# Altium PCB sdlogger.PcbDoc
Units mil, origin at the board's own origin, x right, y up, seen from the top; angles counter-clockwise.
Board outline 1259.84 x 1377.95 mil, 2 copper layers (Top Layer, Bottom Layer); 61 components, 47 nets, 243 pads, 91 vias.
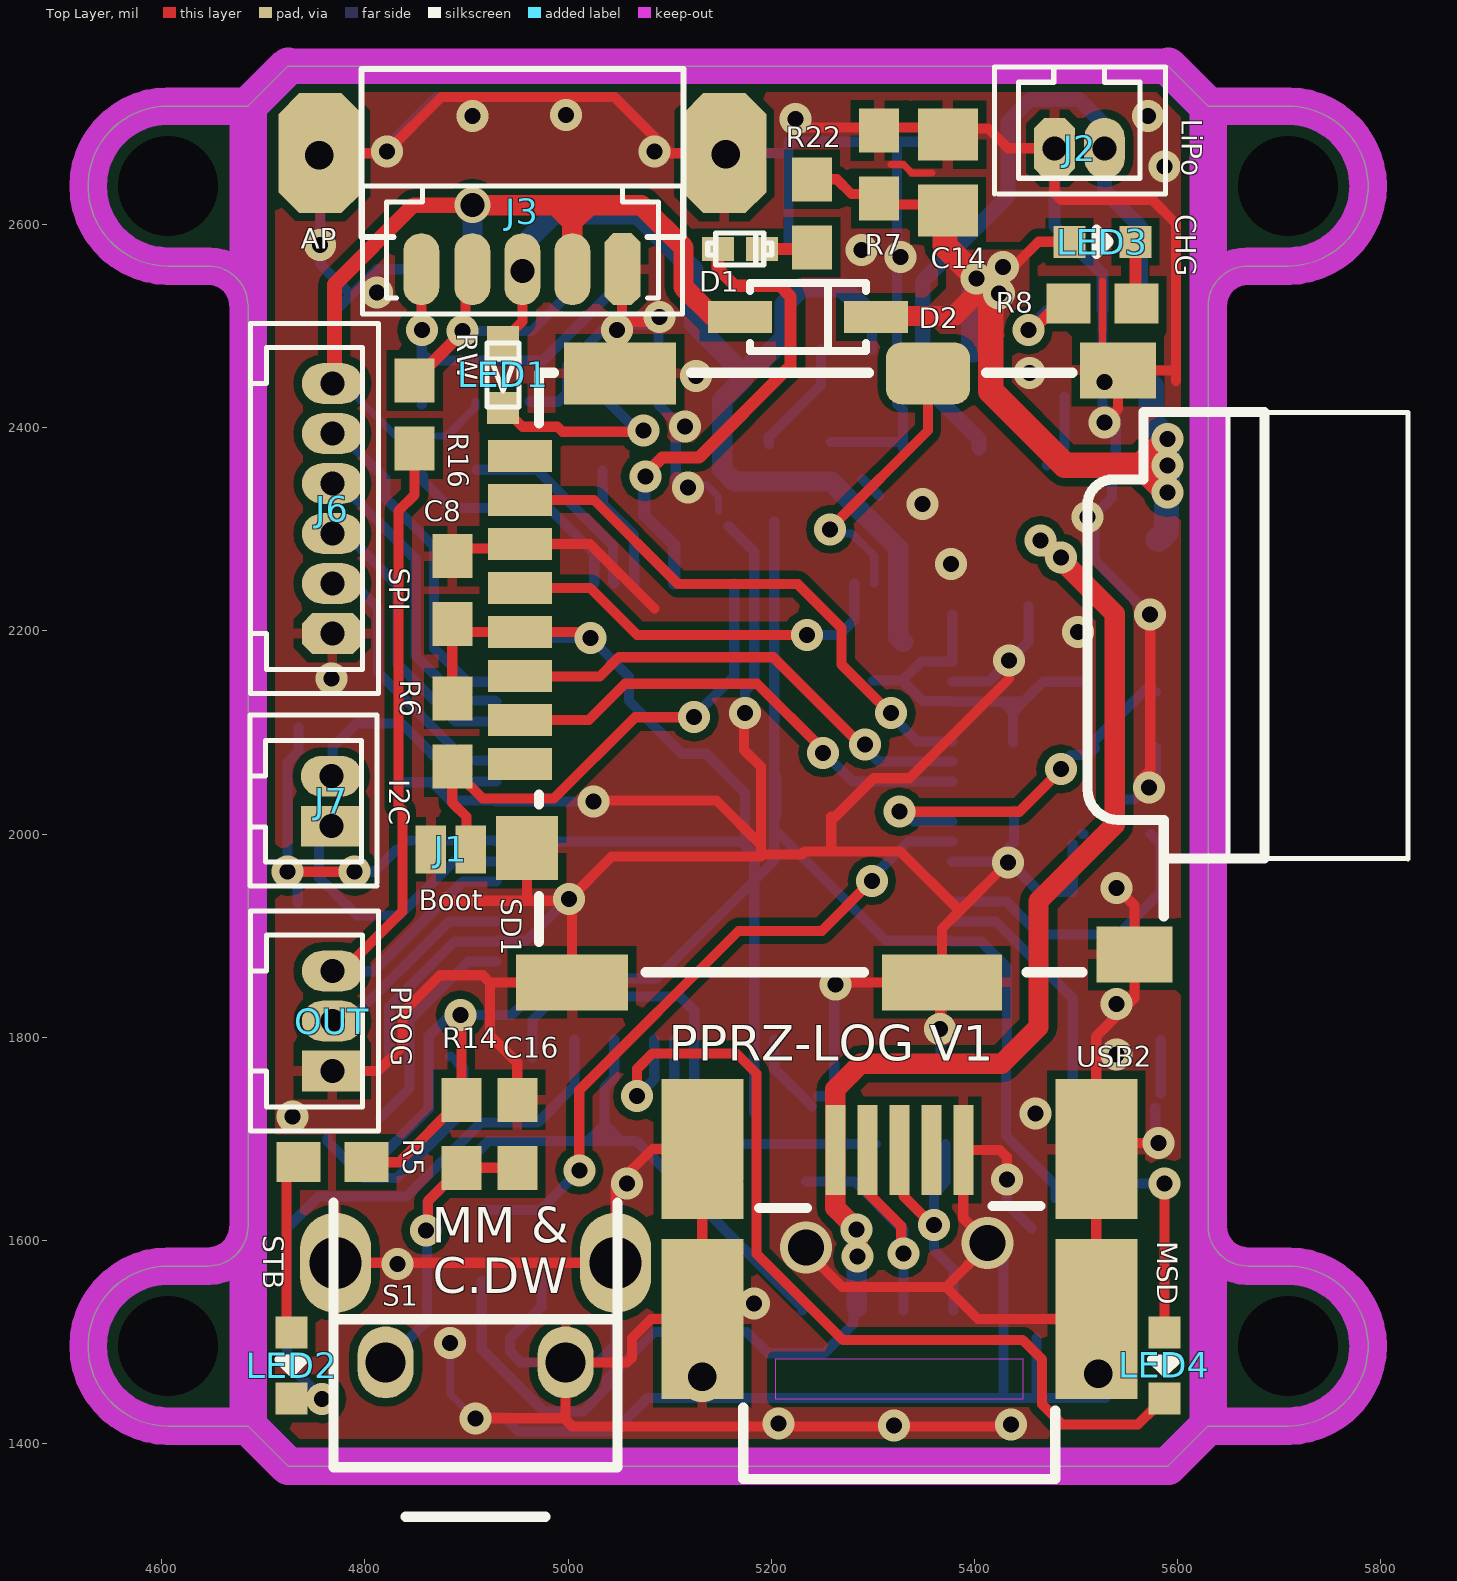
[diagram p0: Top Layer view]
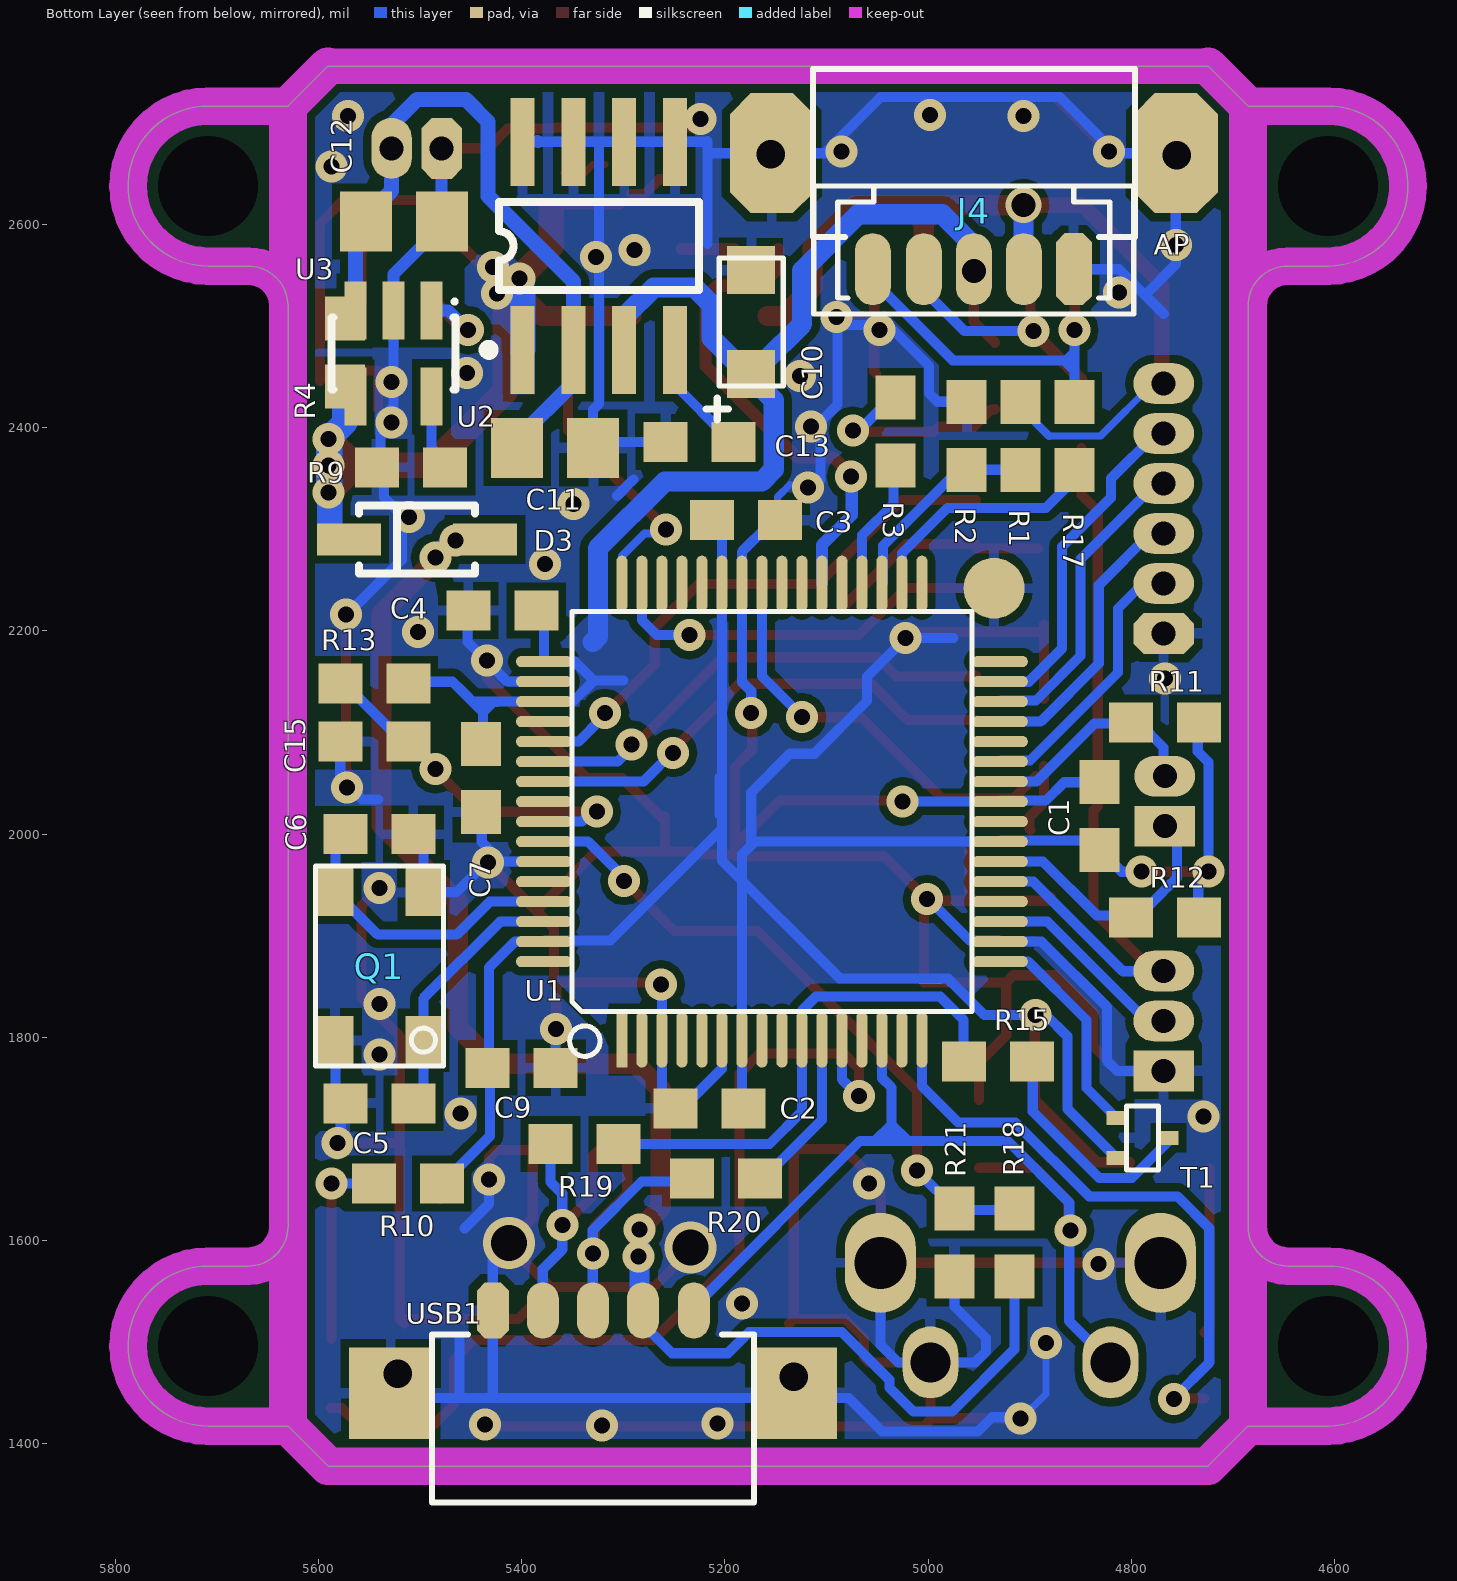
[diagram p1: Bottom Layer view, seen from below]

## Layer stack, top to bottom
Top Layer: signal copper 1.4
Dielectric: dielectric 12.6, FR-4, Dk 4.8
Bottom Layer: signal copper 1.4

## Board outline
4606.3,1417.32 4685.04,1417.32 4724.41,1377.95 5590.55,1377.95 5629.92,1417.32 5708.66,1417.32 ccw(c5708.66,1496.06) 5708.66,1574.8 5669.29,1574.8 cw(c5669.29,1614.17) 5629.92,1614.17 5629.92,2519.69 cw(c5669.29,2519.69) 5669.29,2559.06 5708.66,2559.06 ccw(c5708.66,2637.8) 5708.66,2716.54 5629.92,2716.54 5590.55,2755.91 4724.41,2755.91 4685.04,2716.54 4606.3,2716.54 ccw(c4606.3,2637.8) 4606.3,2559.05 4606.3,2559.06 4645.67,2559.06 cw(c4645.67,2519.68) 4685.04,2519.68 4685.04,1614.17 cw(c4645.67,1614.17) 4645.67,1574.8 4606.3,1574.8 ccw(c4606.3,1496.06)

## Design rules (kind name [scope] priority, off if disabled: settings)
Clearance [All] p1: gap=8
ComponentClearance [All] p1 off: gap=0 collisioncheckmode=3 verticalgap=0 showdistances=FALSE
HoleSize [All] p1: absolutevalues=TRUE maxlimit=196.85 minlimit=1 maxpercent=80.000 minpercent=20.000
MinimumSolderMaskSliver [All] p1: minsoldermaskwidth=0
PlaneConnect PlaneConnectVia [IsVia] p1: planeconnectstyle=Direct reliefexpansion=20 reliefentries=4 reliefconductorwidth=10 reliefairgap=10
PlaneConnect [All] p2: planeconnectstyle=Relief reliefexpansion=20 reliefentries=4 reliefconductorwidth=10 reliefairgap=10
PolygonConnect PolygonConnect_Via [IsVia or InNet('EN/CHG')] p1: connectstyle=Direct reliefconductorwidth=10 reliefentries=4 polygonreliefangle="90 Angle"
PolygonConnect [All] p2: connectstyle=Relief reliefconductorwidth=10 reliefentries=4 polygonreliefangle="90 Angle"
RoutingVias [All] p1: holewidth=28 width=50 viastyle="Through Hole" minholewidth=11.81 minwidth=27.56 maxholewidth=118.11 maxwidth=196.85
SilkToSilkClearance [All] p1: silktosilkclearance=1
SilkscreenOverComponentPads [All] p1 off: minsilkscreentomaskgap=1
SolderMaskExpansion SolderMaskExpansion_Via [IsVia] p1: expansion=-100
SolderMaskExpansion [All] p2: expansion=4
TestPointUsage [All] p1: valid=0 allowmultiple=FALSE
Testpoint [All] p1: side=15 testpointundercomponent=TRUE minsize=40 maxsize=100 preferedsize=60 minholesize=0 maxholesize=40 preferedholesize=32 testpointgrid=1 style=1023 order=0123456789
Width [All] p1: maxlimit=50 minlimit=6 preferedwidth=10 toplayer_minwidth=7 bottomlayer_minwidth=7 minimp=50.000000 maximp=50.000000 favimp=50.000000
18 further rules are at their usual default settings.

## Components (designator, comment, footprint, x,y, rotation, side; value= is the part's Value field where it differs from the comment)
C1 "100nF" 0603 4831,2018 r90 bottom
C2 "100nF" 0603 5215,1730 r180 bottom
C3 "100nF" 0603 5179,2309 r0 bottom
C4 "100nF" 0603 5419,2220 r0 bottom
C5 "18pF" 0603 5540,1735 r180 bottom
C6 "18pF" 0603 5540,2000 r0 bottom
C7 "100nF" 0603 5440,2055 r90 bottom
C8 "0603" 0603 4886,2240 r90 top
C9 "100nF" 0603 5400,1770 r0 bottom
C10 "33uF/6V" T491A 5174,2504 r270 bottom
C11 "470nF" 0805 5367,2380 r180 bottom
C12 "4.7uF" 0805 5516,2603 r180 bottom
C13 "470pF" 0603 5225,2386 r0 bottom
C14 "4.7uF" 0805 5374,2651 r90 top
C15 "100nF" 0603 5545,2091 r0 bottom
C16 "0603" 0603 4950,1705 r270 top
D1 "Schottky 1PS79SB10" 1PS79SB10 5169,2576 r180 top
D2 "Schottky 250mA" SOD123 5236,2509 r0 top
D3 "Schottky 250mA" SOD123 5503,2290 r0 bottom
J1 "Boot" 2pin1mmpitch 4865,1985 r0 top
J2 "LiPo" PICOBLADE_53047-0210#1 5478,2675 r270 top
J3 "AP" PICOBLADE_53047-0510_FLAT 4955,2556 r180 top
J4 "AP" PICOBLADE_53047-0510_FLAT 4955,2556 r0 bottom
J6 "SPI" PICOBLADE_53047-0610 4768,2200 r0 top
J7 "I2C" PICOBLADE_53047-0210#2 4767,2007 r0 top
LED1 "RW" KP-1608SURC 4936,2452 r270 top
LED2 "STB" KP-1608SURC 4728,1477 r270 top
LED3 "CHG" KP-1608SURC 5526,2583 r0 top
LED4 "MSD" KP-1608SURC 5587,1477 r270 top
OUT "PROG" PICOBLADE_53047-0310 4768,1766 r0 top (schematic designator J2)
Q1 "CTS405 12MHz" CTS_405 5540,1870 r90 bottom
R1 "1.8k" 0603RES 4909,2392 r90 bottom
R2 "3.3k" 0603RES 4962,2392 r270 bottom
R3 "1K" 0603RES 5032,2396 r90 bottom
R4 "DNP/0R" 0603RES 5574,2474 r90 bottom
R5 "1K" 0603RES 4768,1677 r0 top
R6 "10K" 0603RES 4886,2100 r90 top
R7 "1M" 0603RES 5306,2659 r270 top
R8 "1K" 0603RES 5526,2522 r180 top
R9 "10K" 0603RES 5509,2361 r180 bottom
R10 "1K" 0603RES 5512,1656 r180 bottom
R11 "4.7K" 0603RES 4767,2110 r180 bottom
R12 "4.7K" 0603RES 4767,1918 r180 bottom
R13 "10k" 0603RES 5545,2148 r0 bottom
R14 "10k" 0603RES 4895,1705 r90 top
R15 "1.5K" 0603RES 4931,1776 r180 bottom
R16 "1k" 0603RES 4849,2413 r90 top
R17 "1k" 0603RES 4856,2392 r90 bottom
R18 "1.8k" 0603RES 4915,1598 r270 bottom
R19 "33" 0603RES 5338,1695 r180 bottom
R20 "33" 0603RES 5199,1661 r180 bottom
R21 "3.3k" 0603RES 4974,1598 r90 bottom
R22 "1k" 0603RES 5240,2611 r90 top
S1 "SW-PB" FSMRA2JH 4909,1480 r0 top locked
SD1 "MICROSD-CARD" MICROSD-CARD 5595,2195 r90 top locked
T1 "DTA143ZE" DTA143ZE 4789,1701 r270 bottom
U1 "LPC2148FBD64" LPC2148FBD64 5153.71,2022.12 r90 bottom
U2 "MIC5209-3.3YM" SO8 5324,2579 r180 bottom
U3 "MCP73831-2 AC or AD" SOT23-5 5526,2473 r0 bottom
USB1 "Remote USB Header" PICOBLADE_53047-0510_FLAT_ONLY 5330,1539 r180 bottom
USB2 "Mini-Usb Connector" MINIUSB 5326,1444 r90 top

## Footprints (in the part's own frame and the unit in brackets; to place one, negate y for a bottom-side part, rotate by r counter-clockwise, add the part's x,y. Pads: shape width x height; smd on the part's side, far side on the other; paste and mask are expansions set on the pad)
1PS79SB10 [mm]
  rect 0.8x0.6 smd: 1(-0.55,0) 2(0.55,0)
  silkscreen extent -0.8,-0.4 0.8,0.4, body extent -0.4,-0.4 0.6,0.4, height 1.5
2pin1mmpitch [mm]
  rect 0.762x1.2 smd: 1(0,0) 2(1,0)
0603 [mm] "Chip Capacitor; Body 1.6 x 0.8 mm (LxW typ)"
  rect 1.1x1 smd: 1(-0.85,0) 2(0.85,0)
  body extent -1.12,-0.46 1.02,0.46, height 0.6
0603RES [mm] "Chip Capacitor; Body 1.6 x 0.8 mm (LxW typ)"
  rect 1.1x1 smd: 1(-0.85,0) 2(0.85,0)
  body extent -1.12,-0.46 1.02,0.46, height 0.4
0805 [mm] "Chip Capacitor; Body 2.0 x 1.2 mm (LxW typ)"
  rect 1.3x1.5 smd: 1(-0.95,0) 2(0.95,0)
  body extent -1.3,-0.66 1.32,0.66, height 0.8
CTS_405 [mm]
  rect 1.2x0.9 smd: 1(-1.85,-1.1) 2(1.85,-1.1) 3(1.85,1.1) 4(-1.85,1.1)
  silkscreen extent -2.5,-1.6 2.5,1.6, body extent -2.5,-1.6 2.5,1.6, height 1.1
DTA143ZE [mm]
  rect 0.35x0.5 smd: 1(-0.5,-0.65) 2(0.5,-0.65) 3(0,0.65)
  silkscreen extent -0.8,-0.4 0.8,0.4, body extent -0.86,-0.46 0.86,0.46, height 0.7
FSMRA2JH [mm] "PushButton Tyco FSMRA2JH 1555987"
  oval 1.397x1.8 hole 1: 1(-2.25,0) 2(2.25,0)
  oval 1.778x2.5 hole 1.3: 2(-3.5,2.49) 2(3.5,2.49)
  silkscreen extent -3.55,-3.86 3.55,4, body extent -3.56,-3.84 3.56,4.01, height 7.01
KP-1608SURC [mm]
  rect 0.8x0.8 smd: 1(-0.825,0) 2(0.825,0)
  silkscreen extent -0.8,-0.4 0.8,0.4, body extent -0.86,-0.46 0.86,0.46, height 0.6
LPC2148FBD64 [mm]
  rect 1.4x0.28 smd: 1(-5.7,3.75)
  oval 1.4x0.28 smd: 2(-5.7,3.25) 3(-5.7,2.75) 4(-5.7,2.25) 5(-5.7,1.75) 6(-5.7,1.25) 7(-5.7,0.75) 8(-5.7,0.25) 9(-5.7,-0.25) 10(-5.7,-0.75) 11(-5.7,-1.25) 12(-5.7,-1.75) 13(-5.7,-2.25) 14(-5.7,-2.75) 15(-5.7,-3.25) 16(-5.7,-3.75) 33(5.7,-3.75) 34(5.7,-3.25) 35(5.7,-2.75) 36(5.7,-2.25) 37(5.7,-1.75) 38(5.7,-1.25) 39(5.7,-0.75) 40(5.7,-0.25) 41(5.7,0.25) 42(5.7,0.75) 43(5.7,1.25) 44(5.7,1.75) 45(5.7,2.25) 46(5.7,2.75) 47(5.7,3.25) 48(5.7,3.75)
  oval 0.28x1.4 smd: 17(-3.75,-5.7) 18(-3.25,-5.7) 19(-2.75,-5.7) 20(-2.25,-5.7) 21(-1.75,-5.7) 22(-1.25,-5.7) 23(-0.75,-5.7) 24(-0.25,-5.7) 25(0.25,-5.7) 26(0.75,-5.7) 27(1.25,-5.7) 28(1.75,-5.7) 29(2.25,-5.7) 30(2.75,-5.7) 31(3.25,-5.7) 32(3.75,-5.7) 49(3.75,5.7) 50(3.25,5.7) 51(2.75,5.7) 52(2.25,5.7) 53(1.75,5.7) 54(1.25,5.7) 55(0.75,5.7) 56(0.25,5.7) 57(-0.25,5.7) 58(-0.75,5.7) 59(-1.25,5.7) 60(-1.75,5.7) 61(-2.25,5.7) 62(-2.75,5.7) 63(-3.25,5.7) 64(-3.75,5.7)
  silkscreen extent -6.12,-5 5,5.06, body extent -5.06,-5.06 5.06,5.06, height 1.3
MICROSD-CARD [mm]
  rrect50% 1.55x2.1 smd: CD(6.566,6.114)
  rect 0.8x1.6 smd: CLK(1.201,16.314) CMD(-0.999,16.314) DAT0(3.401,16.314) DAT1(4.501,16.314) DAT2(-3.199,16.314) DAT3(-2.099,16.314) GND(2.301,16.314) VDD(0.101,16.314)
  rect 1.4x2.8 smd: GND(-8.659,15.014)
  rect 1.4x3 smd: GND(-8.659,5.764)
  rect 1.4x1.9 smd: GND(-7.959,0.95) GND(6.641,1.364)
  rect 1.6x1.55 smd: GND(-5.299,16.139)
  rect 1.55x2.8 smd: GND(6.566,13.814)
  silkscreen extent -8.41,-5.89 6.58,15.84, body extent -8.41,-2.29 6.58,15.84, height 1.95
MINIUSB [mm]
  rect 2.25x0.5 smd: D+(6.225,0) D-(6.225,0.8) Gnd(6.225,-1.6) ID(6.225,-0.8) VBus(6.225,1.6)
  rect 4x2.05 smd: GND(2,4.925) GND(2,-4.925)
  rect 3.5x2.05 smd: GND(6.25,-4.925) GND(6.25,4.925)
  Top Layer keep-out region: 0.001,-3.098 0.991,-3.098 0.991,3.102 0.001,3.102
  silkscreen extent -2,-3.9 4.83,3.9, body extent -1.81,-4.95 7.19,4.95, height 4.6
PICOBLADE_53047-0210#1 [mil]
  oct 60x40 hole 23.62: 1(0,0.79)
  oval 60x40 hole 23.62: 2(0,50)
  silkscreen extent -80,-58 45,110, body extent -80,-60 45,110, height 118
PICOBLADE_53047-0210#2 [mil]
  rect 60x40 hole 23.62: 1(0,0.79)
  oval 60x40 hole 23.62: 2(0,50)
  silkscreen extent -80,-58 45,110, body extent -80,-60 45,110, height 118
PICOBLADE_53047-0310 [mil]
  rect 60x40 hole 23.62: 1(0,0.79)
  oval 60x40 hole 23.62: 2(0,50) 3(0,99.21)
  silkscreen extent -81,-58 45,158, body extent -81,-59 45,158, height 118
PICOBLADE_53047-0510_FLAT [mm]
  oct 2.1x3 smd: 1(-5.05,-2.9) 1(5.05,-2.9)
  oct 0.9x1.8 smd: 1(-2.5,0)
  oval 0.9x1.8 smd: 2(-1.25,0) 3(0,0) 4(1.25,0) 5(2.525,0)
  silkscreen extent -4.03,-5 4.03,1.12, body extent -4.03,-5 4.03,0.18, height 3.4
PICOBLADE_53047-0510_FLAT_ONLY [mm]
  rect 2.1x2.286 smd: 1(-5.05,-2.265) 1(5.05,-2.265)
  oct 0.8x1.4 smd: 1(-2.5,-0.2)
  oval 0.8x1.4 smd: 2(-1.25,-0.2) 3(0,-0.2) 4(1.25,-0.2) 5(2.525,-0.2)
  silkscreen extent -4.03,-5 4.03,-0.8, body extent -4.03,-5 4.03,0.18, height 3.4
PICOBLADE_53047-0610 [mil]
  oct 60x40 hole 23.62: 1(0,-2.64)
  oval 60x40 hole 23.62: 2(0,46.57) 3(0,95.79) 4(0,145) 5(0,194.21) 6(0,243.43)
  silkscreen extent -81,-62 45,302, body extent -82,-62 45,302, height 118
SO8 [mm] "Small Outline; 8 Leads; Body Width 3.9 mm; Pitch 1.27 mm"
  rect 0.6x2.2 smd: 1(-1.905,-2.6) 2(-0.635,-2.6) 3(0.635,-2.6) 4(1.905,-2.6) 5(1.905,2.6) 6(0.635,2.6) 7(-0.635,2.6) 8(-1.905,2.6)
  silkscreen extent -2.88,-2.72 2.5,1.1, body extent -2.5,-1.1 2.5,1.1, height 1.75
SOD123 [mm] "SOD-123; 2 Leads; Body 2.7 x 1.6 mm, (LxW)"
  rect 1.6x0.8 smd: 1(-1.7,0) 2(1.7,0)
  silkscreen extent -1.45,-0.85 1.45,0.85, body extent -1.55,-0.95 1.55,0.95, height 1.35
SOT23-5 [mm] "SOT-23/SC-74A; 5 Leads; Body 3 x 3 mm, inc. leads (LxW max)"
  rect 0.55x1.45 smd: 1(-0.95,-1.075) 2(0,-1.075) 3(0.95,-1.075) 4(0.95,1.075) 5(-0.95,1.075)
  silkscreen extent -1.57,-1.35 1.55,0.9, body extent -1.65,-1.4 1.65,1, height 1.45
T491A [mm]
  rect 1.2x1.2 smd: 1(1.3,0) 2(-1.3,0)
  silkscreen extent -1.6,-1.12 2.45,0.8, body extent -1.66,-0.86 1.66,0.86, height 1.8

## Part data
C1 C2 C3 C4 C5 C6 C7 C9 C11 C12 C13 C14 C15: library part CAP
C8 C16: library part Cap, "Capacitor"
C10: library part ELECTRO1
D1: library part 1PS79SB10, "Diode Schottky 0.2A/30v (GRZ 09/2007)"
D2 D3: library part "D Schottky", "Schottky Diode"
J1 J2 J7: library part "Header 2", "Header, 2-Pin"
J3 J4 USB1: library part "Header 5", "Header, 5-Pin"
J6: library part "Header 6", "Header, 6-Pin"
LED1: library part KP-1608SURC, "Led vert 0603"
LED2: library part KP-1608SURC_1, "Led jaune 0603"
LED3 LED4: library part KP-1608SURC, "Led rouge 0603 (GRZ 10/2007)"
OUT: library part "Header 3", "Header, 3-Pin"
Q1: library part CRYSTAL_CTS_405, "Crystal 12 Mhz SMD (DMT 06/2007)"
R1 R2 R3 R4 R5 R6 R7 R8 R9 R10 R11 R12 R13 R14 R15 R16 R17 R18 R19 R20 R21 R22: library part RES1
S1: "Switch"
T1: "PNP PRE-BIASED SMALL SIGNAL SURFACE MOUNT TRANSISTOR (GRZ 09/2009)"
U1: "Single-chip ARM7 32-bit microcontroller (GRZ 04/2007)"
U2: "Micropower 100 mA Ultra Low-Dropout Regulator in SOT-23 and micro SMD Packages"
U3: library part MCP73831-2Ax, "Lithium Battery Charger max 500mA: 7.5% I/Ireg stop, 10% Iprecon ..."
USB2: library part USB_Host, "Mini USB Connector"

## Free pads (board coordinates)
  round 0 hole 98.43: 0(4606.3,1496.06) 0(4606.3,2637.8) 0(5708.66,1496.06) 0(5708.66,2637.8)
  round 60 smd far side: 0(4935,2242)

## Via types
v1: diameter 31.5, hole 15.75, Top Layer to Bottom Layer, 83 vias
v2: diameter 50, hole 28, Top Layer to Bottom Layer, 4 vias
v3: diameter 51.18, hole 35.43, Top Layer to Bottom Layer, tented both sides, 2 vias
v4: diameter 35.43, hole 23.62, Top Layer to Bottom Layer, 2 vias

## Nets (pads, with @x,y where several pads share a name; then routed paths per layer and width w, separated by ;. In a path a pad name is that pad's centre, name@x,y a point inside that pad or via, vN(x,y) a via of type N, cw(c..) or ccw(c..) an arc to the next point about the centre after c; other vN are vias at no path point)
+3.3V: C1.1 C2.2 C3.2 C4.1 C7.2 C8.1 C9.2 C10.1 J3.3 J4.3 LED1.1 pad.0@4935,2242 R5.2 R6.2 R10.2 R11.2 R12.2 R13.1 R14.2 SD1.VDD T1.2 U1.7 U1.23 U1.43 U1.49 U1.51 U1.63 U2.3 | length 4537.7
  Top Layer w10: v1(4724,1963) v1(4790,1963) ; R5.2 4833.54,1677 R14.2 v1@4895,1822 ; R6.2@4886,2132.93 C8.1@4886,2206 ; C8.1@4892.57,2198.96 SD1.VDD v1@5021.04,2198.96 ; LED1.1@4934,2483.48 4955,2504.48 J3.3
  Bottom Layer w10: v1@4724,1958 4734,1948 R12.2@4734,1932 ; v1@4724,1964 4724,2070.67 4734.54,2081.2 R11.2@4734.54,2105 ; v1(4790,1963) 4809.46,1963 C1.1 ; T1.2 4862.88,1729.61 4862.88,1801.07 4883.81,1822 4944.54,1822 4980.54,1858 5087,1858 5202.92,1973.92 U1.43 C3.2@5202.92,2307.61 ; C1.1@4842.76,1993.76 4928.12,1993.76 U1.23 5170.41,1992.59 5183.24,1979.76 U1.7 C2.2@5183.24,1725.32 ; 4975,2193 v1(5022,2193) 5060,2155 5060,2131 5112,2079 5136,2079 5174,2041 5174,1989 ; 5202.92,2019 5202.92,2005.08 5312.66,1895.34 5376.95,1895.34 U1.63 5406.66,1894.17 5432,1868.83 5432,1771.46 5431,1770.46 5431,1703 5480,1654 R10.2@5480,1641.54 ; 5205,2019 5205,2056 ; U2.3 U2.3@5299,2509 ; 5300,2151 5328.96,2151 ; C4.1@5378.12,2216 U1.49 5347.72,2169.76 5333.98,2156.02 5328.96,2151 ; 5430,2128 5446,2128 ; C7.2@5438,2090 5438,2120 ; 5448.39,2130.39 5417,2130.39 ; R13.1@5509.54,2150 5468,2150 5458,2140 5446,2128 ; 5328.96,2151 5348.96,2131 5377.51,2131 U1.51 5417,2130.39 ; 5417,2130.39 5427.61,2130.39 5438,2120 ; 5417,2130.39 5446,2128 ; 5438,2120 5446,2128
  Bottom Layer w20: J4.3@4956,2580 4986,2610 5068.64,2610 5124,2554.64 5124,2502 C10.1@5162,2464 ; C10.1@5172,2447 5151.88,2426.88 5151.88,2358.86 5163.74,2347 5259.11,2347 5324.86,2281.26 5324.86,2194.14 5330,2189 ; C10.1@5181.18,2463.18 5188.18,2463.18 5213,2488 5213,2521.21 5229.73,2537.95 5270.06,2537.95 U2.3@5299,2509
  other v1: 4894,1822
  other v4: 4955,2554
+5V: D2.1 J3.2 J4.2 J6.6 R1.2 | length 944.2
  Top Layer w15: J6.6@4770,2444 4770,2541 4848,2619 v4(4906,2619)
  Top Layer w20: v4(4906,2619) 5000,2619 5004.21,2614.79 5004.21,2602 ; 4964,2619 5072,2619 5113.6,2577.4 5113.6,2538.4 5142,2510 D2.1@5158.07,2510 ; 4987.21,2619 5004.21,2602 ; J3.2@5004.21,2578.79 5004.21,2602 ; 5021.21,2619 5004.21,2602
  Bottom Layer w7: J6.6@4778.57,2443.43 4830,2392 4880.84,2392
  Bottom Layer w8: 4880.84,2392 4909,2420.16 R1.2
  Bottom Layer w20: J4.2 4906,2556.21 v4@4906,2620
BOOT: J1.2 R6.1 U1.41 | length 487.5
  Top Layer w10: R6.1@4886,2067.17 4886,2031 4900,2017 4900,2005 J1.2@4899,2004 ; R6.1@4894,2057 4916,2035 4986,2035 5066,2115 v1@5123,2115
  Bottom Layer w10: v1@5124,2116 5163.55,2155.55 U1.41
  other v1: 5124,2115
BUTTON: C16.2 R14.1 S1.1 U1.14 USB1.5 | length 921.4
  Top Layer w10: v1@4865,1611 4862,1614 4862,1638.54 R14.1 C16.2
  Bottom Layer w10: S1.1@4822,1481.58 S1.1 4861,1520.58 4861,1637.19 4921.81,1698 5067,1698 5230.59,1534.41 USB1.5 ; 5020,1698 5036,1714 ; 5036,1698 5036,1714 ; U1.14 5045.44,1760.1 5036,1750.66 5036,1714 ; 5052,1698 5036,1714
  other v1: 4860,1610
BYP: C13.1 U2.4 | length 145.9
  Bottom Layer w10: C13.1@5197.54,2384 5197.54,2390.54 5249,2442 U2.4 U2.4@5249,2444.69
CARD: SD1.CD U1.48 | length 269.4
  Top Layer w10: v1@5262,2295 5262,2305 5354.28,2397.28 SD1.CD
  Bottom Layer w8: v1@5265,2296 5279,2296 5301.35,2273.66 U1.48
  other v1: 5258,2300
CHLED: R8.2 U3.1 | length 92.7
  Top Layer w12: v1@5454,2493 5483,2522 R8.2
  Bottom Layer w12: v1@5454,2497 5472.32,2515.32 U3.1
  other v1: 5453,2496
DETECT: R1.1 R2.2 U1.35 | length 199.5
  Bottom Layer w10: R1.1@4910,2358.54 R2.2@4964,2358.54 ; R2.2@4968,2360 5044.27,2283.73 5044.27,2247.7 U1.35
EN/CHG: C14.1 D2.2 D3.2 LED3.1 R4.1 R7.2 R22.2 U2.1 U3.4 | length 1070.6
  Top Layer w10: R22.2@5244,2644.46 5264.54,2644.46 5279,2630 R7.2@5293,2630 ; R7.2@5303.94,2619.6 C14.1@5369,2619.6 ; v1@5433,2553 5463,2583 LED3.1
  Top Layer w20: D2.2@5291.93,2510 5380,2510 v1@5411,2541
  Top Layer w25: C14.1@5371,2613.6 5371,2579 5416.12,2533.88 5416.12,2435.88 5489,2363 v1@5584,2363 ; 5563,2363 v1(5590,2336) ; 5564,2363 v1(5590,2389)
  Bottom Layer w25: U2.1 5399,2532 v1@5412,2545 ; R4.1 5574,2405 v1(5590,2389) v1@5590,2342 ; D3.2@5581,2290 5589,2298 v1@5589,2384
  other v1: 5590,2363 5424,2532 5402,2547 5428,2558
GND: C1.2 C2.1 C3.1 C4.2 C5.1 C6.1 C7.1 C8.2 C9.1 C10.2 C11.2 C12.2 C13.2 C14.2 C15.2 C16.1 J1.1 J2.1 J3.1 J4.1 J6.1 OUT.1 Q1.2 Q1.4 R2.1 R7.1 R9.1 R21.1 S1.2 SD1.GND U1.3 U1.6 U1.18 U1.25 U1.42 U1.50 U1.59 U2.5 U2.6 U2.7 U2.8 U3.2 USB1.1 USB2.Gnd USB2.GND | length 11389.2
  Top Layer w7: 5318,2659 5329.69,2659 5330.14,2659 5338.45,2650.69 5358,2650.69 ; SD1.GND@5526,2471.73 5526,2544
  Top Layer w10: J3.1@4756.18,2670.17 4820.17,2670.17 4875.41,2725.41 5045.59,2725.41 5100.83,2670.17 J3.1@5153.82,2670.17 ; OUT.1 4812.79,1766.79 4837,1791 4837,1824 4874,1861 4916,1861 4923,1854 ; S1.2@4771.2,1578.03 5046.8,1578.03 5046.8,1653.8 5083.06,1690.06 5132.1,1690.06 USB2.GND@5132.1,1522.74 ; 4879,1935 4879,1938 ; 4879.6,1934.4 4959.6,1934.4 ; C8.2@4892,2281 SD1.GND@4952.6,2281 ; v1(4909,1425) 4994,1425 4997.58,1428.58 S1.2@4997.58,1480 ; C16.1 4950,1775 4923,1802 4923,1854 ; SD1.GND@4952.71,2285.57 5021.43,2285.57 5085,2222 ; SD1.GND@4959.6,1986.36 4959.6,1934.4 ; v1(5001,1936) 5043,1978 5190,1978 ; v1@5024,2039 5030,2033 5146,2033 5190,1989 ; SD1.GND@5051.13,2453.49 5053,2455.35 v1@5053,2504 ; J3.1@5054,2556 5053,2555 v1@5053,2504 ; v1@5086,2504 v1@5053,2504 ; USB2.GND@5136.59,1518.25 USB2.GND@5132.1,1522.74 ; v1@5173,2117 5173,2083 5190,2066 5190,1980 5230,1980 5233,1983 5259,1983 5259,2017 5263,2017 5301,2055 5336,2055 5344,2063 ; v3(5234,1593) 5234,1590 5269.75,1554.25 5371.91,1554.25 ; v1@5234.46,2695.46 5367.94,2695.46 5369,2694.4 5413.6,2694.4 5433,2675 J2.1 5478.79,2631.21 5486,2624 5575.42,2624 5598.42,2601 5598.42,2446 ; 5259.25,1982.75 5327.25,1982.75 5385.5,1924.5 ; v1@5264,1854.08 5368.06,1854.08 5368.06,1907.06 5385.5,1924.5 ; 5339,2058 5434,2153 v1(5434,2171) ; v1(5366,1808) SD1.GND@5366,1852.02 ; v3@5410,1601 5389,1622 USB2.Gnd 5424.92,1689.08 5432,1682 v1(5432,1660) ; v3(5412.61,1597.54) 5412.61,1594.96 5371.91,1554.25 ; v1@5436,1417 5004,1417 4997.58,1423.42 S1.2@4997.58,1480 ; v1@5440,1965 v1(5433,1972) 5385.5,1924.5 ; USB2.GND@5515.41,1518.25 USB2.GND@5519.9,1522.74 ; USB2.GND@5518.91,1689.08 USB2.GND@5519.9,1690.06 ; USB2.GND@5525.83,1696 v1@5578,1696 ; v1@5528,2407 5529,2406 5541.29,2418.29 5541.29,2456.44 5596.98,2456.44 ; v1(5540,1947) 5557.6,1929.4 5557.6,1881.64 5557.6,1838.6 5519.9,1800.9 USB2.GND@5519.9,1690.06 ; v1@5564,2046 5564,2054 5573,2063 v1(5573,2216) ; 4923,1854 4923.08,1854.08 5003.89,1854.08 5003.89,1933.11 5002.6,1934.4 4959.6,1934.4 ; S1.2@4997.58,1480 5058,1480 5063,1485 5063,1504 5081.74,1522.74 USB2.GND@5132.1,1522.74 ; 5371.91,1554.25 5403.42,1522.74 USB2.GND@5519.9,1522.74 ; USB2.GND@5519.9,1522.74 USB2.GND@5519.9,1690.06
  Bottom Layer w7: v1(4884,1499) 4884,1449 v1@4907,1426 ; 5136,2344 5148,2332 C3.1@5148,2318
  Bottom Layer w10: OUT.1 4813.79,1766.79 4824,1777 4824,1829.9 4888.27,1894.17 U1.18 4930.47,1895.34 4959.01,1895.34 v1@4999,1935.32 ; 4768,2512 4812,2556 J4.1@4856.57,2556 ; 4786.5,2530.5 4756.18,2560.82 4756.18,2670.17 4815.17,2670.17 4870.41,2725.41 5046.59,2725.41 5101.83,2670.17 5153.82,2670.17 5215.83,2670.17 ; C1.2@4839,2051 4866,2051 4883.87,2033.13 4928.12,2033.13 U1.25 v1@5023,2031.96 ; v1@4907,1426 4937,1426 4951,1412 5045,1412 5077.83,1444.83 5131.18,1444.83 USB1.1@5528.82,1444.83 ; R2.1 4990.46,2425.46 4999,2434 4999,2461 5039,2501 v1@5089,2501 ; R21.1 4974,1535 4943,1504 4943,1490.46 4953.46,1480 4997.58,1480 5029.54,1480 5046.8,1497.25 5046.8,1578.03 S1.2@5047.83,1577 ; S1.2@4998,1480 S1.2@4998.75,1480.75 ; v1@5089,2507 5089,2422.66 5106,2405.66 5106,2348.54 v1@5120.77,2333.77 ; C3.1@5158,2303 5183.24,2277.76 U1.42 5183.24,2149.78 5174,2140.54 v1@5174,2118 ; U1.6 5202.92,1769.08 C2.1@5240,1732 ; 5217,2581 5217,2682 ; 5217.64,2681.36 U2.8 ; C2.1@5246,1742 5261,1742 5261.98,1742.98 U1.3 v1@5261.98,1855.98 ; C13.2 C11.2@5323.6,2386 ; 5290,2349 5306,2333 ; 5323.81,2679.55 5323.81,2423.39 5329.6,2417.6 C11.2 ; C9.1 v1@5366.54,1807.46 ; U1.59 5419.91,1972.91 5439,1992 C7.1@5439,2023 ; U1.50 5414.07,2150.07 5453.27,2189.27 C4.2@5453.27,2224.22 ; v1@5427,1980 5464.17,1942.83 Q1.2 C6.1@5496.69,1990.16 ; 5428.43,1445.4 5428.43,1531.13 v3@5428.43,1581.73 ; v1(5432,1660) 5432,1636 5456,1612 ; 5461,1446.83 5461,1504 ; C6.1 C6.1@5507,2000 ; U3.2@5526,2512 5526,2448 5526,2421 v1@5535.46,2411.54 ; R9.1@5535.46,2362 5535.46,2331.46 5518,2314 5518,2270 v1@5572,2216 ; R9.1@5539,2358.46 v1@5539,2411 ; 5541,2034 5557,2034 5578.46,2055.46 C15.2@5578.46,2085 ; v1@5578,1696 C5.1@5578,1730.46 ; C5.1@5583.31,1744.84 Q1.4
  Bottom Layer w12: 5384,2681.36 5384.64,2682 ; J2.1 5478.79,2598.21 5526,2551 U3.2
  other v1: 5321,1418 5436,1419 5207,1420 5183,1538 4832,1577 5058,1656 5581,1696 4729,1722 5460,1725 5540,1783 5540,1833 5263,1852 5025,2032 5572,2046 5174,2119 4767,2153 5502,2199 5377,2266 5511,2312 5349,2325 5118,2341 5115,2401 5528,2405 5528,2445 5126,2451 5454,2454 5048,2496 5090,2509 4812,2533 5327,2568 5289,2575 4756,2580 5587,2657 4822,2672 5085,2672 5224,2704 4906,2707 5571,2707 4998,2708
  other v2: 5132,1466 5522,1469 4755,2668 5155,2669
KEEPON: D1.2 U1.38 | length 474.5
  Top Layer w12: v1@5080,2356 5080,2358 5092.75,2370.75 5128.75,2370.75 5219,2461 5219,2529 5208.25,2539.75 5164.25,2539.75 5147.35,2556.65 D1.2
  Bottom Layer w12: v1@5079,2353 5075,2349 5075,2313.91 5104.5,2284.41 U1.38
  other v1: 5076,2352
L1: LED4.1 R10.1 | length 194.5
  Top Layer w10: LED4.1@5587,1503 v1(5587,1656)
  Bottom Layer w10: R10.1 v1(5587,1656)
L2: LED2.1 R5.1 | length 163.6
  Top Layer w10: R5.1@4723,1671 4723,1514.48 LED2.1
L3: LED1.2 R3.2 | length 199.7
  Top Layer w10: LED1.2@4934,2418.52 4934.52,2418 4938,2418 4955.06,2400.94 4989.59,2400.94 4994.53,2396 v1@5077,2396
  Bottom Layer w10: R3.2@5037.54,2427.46 v1@5071,2394
  other v1: 5074,2397
L4: LED3.2 R8.1 | length 60
  Top Layer w12: R8.1@5558.48,2522.98 LED3.2
LED1: LED4.2 U1.12 | length 903.5
  Top Layer w10: v1(5068,1742) 5068,1769 5083,1784 5165.8,1784 5185.46,1764.35 5185.46,1586.97 5270.42,1502 5447.38,1502 5466.54,1482.83 5466.54,1438.62 5486.16,1419 5561,1419 5577,1435 LED4.2@5588,1435
  Bottom Layer w10: v1(5068,1742) 5084.81,1758.81 U1.12
LED2: LED2.2 U1.16 | length 612.1
  Top Layer w10: LED2.2 v1@4764.48,1444.52
  Bottom Layer w10: v1@4766,1446 4757,1446 4723.2,1479.8 4723.2,1612.13 4754.5,1643.43 4841.43,1643.43 4914,1716 4970,1716 5006.07,1752.07 U1.16
  other v1: 4758,1444
LED3: R3.1 U1.36 | length 124.3
  Bottom Layer w10: R3.1@5034,2358 5034.06,2324.93 5065.04,2294.07 U1.36
LIPO: C11.1 C12.1 J2.2 R4.2 U2.2 U3.3 | length 690.4
  Bottom Layer w15: C11.1 5404.4,2388.6 5349,2444 U2.2 5349,2544 5433,2628 5433,2701.13 5454.77,2722.91 5502.8,2722.91 5528,2697.71 J2.2 5528,2633 5563.4,2597.6 U3.3
LPC_RESET: C15.1 R13.2 U1.57 | length 360.8
  Top Layer w10: v1@5325,2022 5444,2022 v1@5484,2062
  Bottom Layer w10: v1@5323,2022 5331,2022 5340.72,2012.28 U1.57 ; v1@5483,2066 5494.79,2077.79 5511.54,2077.79 C15.1@5518.74,2085 ; C15.1@5518,2092 R13.2@5573,2147 ; R13.2@5573.74,2140 R13.2@5578.46,2140
  other v1: 5326,2022 5485,2064
LPC_RXD0: OUT.3 R16.1 U1.21 | length 753.1
  Top Layer w10: OUT.3@4770,1866 4779,1866 4837,1924 4837,2023.5 4833,2027.5 4833,2318 4849,2334 R16.1@4849,2380
  Bottom Layer w10: OUT.3@4768,1865 4808.19,1865 4896.41,1953.22 U1.21
LPC_TXD0: OUT.2 U1.19 | length 201.8
  Bottom Layer w10: OUT.2 4784.64,1816 4882.49,1913.85 U1.19
MISO: SD1.DAT0 U1.53 | length 546.1
  Top Layer w10: SD1.DAT0 5025.57,2328.88 5108.46,2246 5226,2246 5269,2203 5269,2167 v1@5318,2118
  Bottom Layer w10: v1@5320.5,2119.5 5320.5,2114.5 5343.98,2091.02 U1.53
  other v1: 5318,2119
MISO0: J6.3 U1.29 | length 282.4
  Bottom Layer w10: J6.3 J6.3@4780.21,2295.79 ; J6.3@4781,2296 4832,2245 4832,2167.92 4889.22,2110.7 U1.29
MOSI: SD1.CMD U1.54 | length 472
  Top Layer w10: SD1.CMD@4953.06,2156 4954.06,2155 5031,2155 5050,2174 5202,2174 v1@5284,2092
  Bottom Layer w10: v1@5287,2090 5305.67,2071.33 U1.54
  other v1: 5292,2088
MOSI0: J6.4 U1.30 | length 305.9
  Bottom Layer w10: J6.4 4775.46,2345 4850,2270.46 4850,2175.37 4893.81,2131.56 4928.13,2131.56 U1.30
NetD1_1: D1.1 R22.1 | length 51.8
  Top Layer w12: D1.1 R22.1@5242.46,2576
R0: J3.4 J4.4 R16.2 | length 272.1
  Top Layer w10: v1@4898,2491 v1@4899,2492 ; v1@4899,2503.21 4899,2549.21 J3.4
  Top Layer w12: R16.2@4849,2447 4849.07,2447 4885.75,2483.68 4885.75,2483.75 4893,2491 v1@4898,2491 ; v1@4899,2492 v1@4899,2503.21
  Bottom Layer w10: v1@4905,2495 4964,2495 5004.21,2535.21 J4.4
  other v1: 4896,2495
R1: J3.5 J4.5 R17.2 | length 401.8
  Top Layer w10: v1@4855.59,2496.59 J3.5
  Bottom Layer w10: R17.2@4856,2423 v1(4856,2496) ; 4856,2456.25 4866,2466.25 ; 4856,2466.25 4866,2466.25 ; 4856,2474 4863.75,2466.25 4866,2466.25 ; J4.5 5054.41,2545.04 4975.62,2466.25 4866,2466.25
RSET: R9.2 U3.5 | length 74.7
  Bottom Layer w10: R9.2@5471.54,2363 5488.6,2380.06 U3.5
RXD1: R17.1 U1.34 | length 233.2
  Bottom Layer w10: R17.1@4857,2353 4857,2348 4884,2321 4981,2321 5025.76,2276.24 U1.34
SCK: SD1.CLK U1.47 | length 393.1
  Top Layer w10: SD1.CLK 5021.73,2242.27 5068,2196 v1@5240,2196
  Bottom Layer w10: v1@5237,2196 5267,2196 5281.66,2210.66 U1.47
  other v1: 5235,2196
SCK0: J6.2 U1.27 | length 255.2
  Bottom Layer w10: J6.2@4785,2250 4813,2222 4813,2159.09 4899.58,2072.5 4928.12,2072.5 U1.27
SCL: J7.1 R12.1 U1.22 | length 264.2
  Bottom Layer w10: J7.1@4766,2005 4755,1994 4755,1957 4761.31,1950.69 4761.57,1950.69 4769.19,1943.07 4769.19,1942.81 4792,1920 4834,1920 4886.91,1972.91 U1.22
SDA: J7.2 R11.1 U1.26 | length 219.8
  Bottom Layer w10: J7.2@4766,2061 4768.19,2063.19 4768.19,2085.19 4792,2109 4836,2109 4893.35,2051.65 U1.26
SSEL: SD1.DAT3 U1.55 | length 481.4
  Top Layer w10: SD1.DAT3 5020.35,2112.35 5056,2148 5186,2148 v1@5250.5,2083.5
  Bottom Layer w10: v1@5249,2083 5280.35,2051.65 U1.55
  other v1: 5251,2080
SSEL0: J6.5 U1.31 | length 348.4
  Top Layer w15: J6.5@4753.22,2398 4764.21,2398 J6.5
  Bottom Layer w10: J6.5 4775.46,2394.21 4820,2349.67 4820,2331 4868,2283 4868,2182.83 4900.83,2150 4929.23,2150 U1.31
USB+: R19.1 USB1.2 USB2.D+ | length 269
  Top Layer w10: USB2.D+@5325,1688.08 5330,1683.08 5330,1644 5361,1613 v1@5361,1612
  Bottom Layer w10: v1@5359,1616 v1(5360,1615) ; R19.1 5371.46,1657.46 5360,1646 v1(5360,1615) ; USB1.2 5379.21,1571.79 5360,1591 v1(5360,1615)
USB-: R20.1 USB1.3 USB2.D- | length 305.2
  Top Layer w10: USB2.D- 5296,1687.58 5296,1646 5328,1614 v1@5328,1592
  Bottom Layer w10: R20.1@5234.46,1658 5282,1658 5330,1610 USB1.3
  other v1: 5330,1587
USB_CONNECT: T1.1 U1.17 | length 217.1
  Bottom Layer w10: T1.1@4815,1721 4844,1750 4844,1817 4901.48,1874.48 U1.17
USB_N: R20.2 U1.11 | length 167.3
  Bottom Layer w10: U1.11 5104.5,1718.5 5165,1658 R20.2@5167.54,1658
USB_P: R15.1 R19.2 U1.10 | length 502.8
  Bottom Layer w10: R15.1@4965,1780 4965,1817 4988,1840 5110.43,1840 5124.18,1826.25 U1.10 5124.18,1726.82 5156,1695 R19.2@5303,1695
USB_VBUS: D3.1 R18.2 USB1.4 USB2.VBus | length 1655.8
  Top Layer w10: USB2.VBus@5263.01,1650.01 USB2.VBus USB2.VBus@5263.01,1719.99
  Top Layer w20: v1(5285,1584) 5285,1610 5263.01,1631.99 USB2.VBus 5263.01,1749.01 5288,1774 5427,1774 5463,1810 5463,1934 5538,2009 5538,2217 v1@5464,2291
  Bottom Layer w10: R18.2@4915,1560 4915,1493 4976.43,1431.57 5014.36,1431.57 5038.08,1455.29 5038.08,1463.08 5085,1510 5176,1510 5197,1489 5252,1489 5280.79,1517.79 USB1.4 USB1.4@5280.79,1518.79
  Bottom Layer w20: USB1.4@5284,1534.34 v1(5284,1611) ; D3.1@5467,2290 v1(5485,2272)
  other v1: 5465,2289
USB_VBUS_3V3: R18.1 R21.2 U1.58 | length 653.4
  Top Layer w10: v1@5011,1670 5011,1748 5167.66,1904.66 5249.66,1904.66 v1(5299,1954)
  Bottom Layer w10: R18.1@4916,1630 R21.2@4974,1630 ; R21.2 v1@5009.54,1667 ; v1@5299,1957 5334.59,1992.59 U1.58
  other v1: 5011,1669
USBPU: R15.2 T1.3 | length 231.5
  Bottom Layer w10: T1.3 4763.41,1697.38 4799.36,1661.43 4831.43,1661.43 4897,1727 4897,1769.54 R15.2@4890.54,1776 ; R15.2@4884,1781 R15.2@4884.54,1781
XTAL1: C5.2 Q1.1 U1.62 | length 243.3
  Bottom Layer w10: U1.62 5421.15,1913.85 5496.69,1838.31 Q1.1 C5.2@5496.69,1744.84
XTAL2: C6.2 Q1.3 U1.61 | length 297.2
  Bottom Layer w10: U1.61 5431.46,1933.54 5464,1901 5541.47,1901 Q1.3 5583.31,1990.16 C6.2
pads on no net: SD1.DAT1 SD1.DAT2 U1.1 U1.2 U1.4 U1.5 U1.8 U1.9 U1.13 U1.15 U1.20 U1.24 U1.28 U1.32 U1.33 U1.37 U1.39 U1.40 U1.44 U1.45 U1.46 U1.52 U1.56 U1.60 U1.64 USB2.ID

## Polygon pours and split planes (outlines as drawn)
GND on Top Layer "Gnd" (solid, pour order 1000): 4678,2247 4672,2710 4723,2760 5588,2759 5633,2711 5633,2457 5637,1437 5586,1382 4726,1385 4675,1436
EN/CHG on Top Layer "Gnd" (solid): 5426,2486 5454,2514 5454,2575 5372,2575 5372,2537 5347,2512 5412,2447 5426,2447
GND on Bottom Layer "Gnd" (solid, pour order 1002): 4680,1425 4679,2713 4733.6,2757 5581,2757 5633,2711 5634,1425 5587,1378 4726,1378
EN/CHG on Bottom Layer "Full" (solid): 5421,2502 5441,2502 5456,2517 5456,2557 5443,2570 5411,2570 5387,2546 5387,2433 5411,2433 5411,2492
+3.3V on Bottom Layer "Gnd" (solid, pour order 1001): 4928,2168 4862,2169 4862,2317 5006,2317 5005,2245 5305,2245 5380,2170 5380,1870 5303,1793 5004,1793 4926,1871

## Keep-outs
Keep-Out Layer:
  lines w35: 4724.41,2755.91 5590.55,2755.91
  lines w37: 4724.41,2755.91 4685.04,2716.54 ; 5590.55,2755.91 5629.92,2716.54 ; 4685.04,1417.32 4606.3,1417.32 cw(c4606.3,1496.06) 4606.3,1574.8 4645.67,1574.8 ccw(c4645.67,1614.17) 4685.04,1614.17 ; 4685.04,1417.32 4724.41,1377.95 5590.55,1377.95 5629.92,1417.32 ; 4685.04,1417.32 4685.04,1614.17 ; 4685.04,1614.17 4685.04,2519.68 ; 4685.04,2519.68 ccw(c4645.67,2519.68) 4645.67,2559.06 4606.3,2559.06 cw(c4606.3,2637.8) 4606.3,2716.54 4685.04,2716.54 ; 4685.04,2519.68 4685.04,2716.54 ; 5629.92,1417.32 5708.66,1417.32 ccw(c5708.66,1496.06) 5708.66,1574.8 5669.29,1574.8 cw(c5669.29,1614.17) 5629.92,1614.17 ; 5629.92,1417.32 5629.92,1614.17 ; 5629.92,1614.17 5629.92,2519.68 ; 5629.92,2519.69 cw(c5669.29,2519.69) 5669.29,2559.06 5708.66,2559.06 ccw(c5708.66,2637.8) 5708.66,2716.54 5629.92,2716.54 ; 5629.92,2519.68 5629.92,2716.54

## Silkscreen, mask and mechanical layers (free items; w line width, h text height)
Top Overlay:
  text "PPRZ-LOG V1" at 5099,1777 h35
  text "MM &" at 4866,1598 h35
  text "C.DW" at 4867,1548 h35
Top Solder:
  rectangle: 5629.92,2519.68 5787.4,2716.54
  rectangle: 5629.92,1417.32 5787.4,1614.17
  rectangle: 4527.56,1417.32 4685.04,1614.17
  rectangle: 4527.56,2519.68 4685.04,2716.54
Bottom Solder:
  rectangle: 5629.92,2519.68 5787.4,2716.54
  rectangle: 5629.92,1417.32 5787.4,1614.17
  rectangle: 4527.56,1417.32 4685.04,1614.17
  rectangle: 4527.56,2519.68 4685.04,2716.54

## Dimensions
4527.56,2755.91 to 5787.4,2755.91 on Drill Drawing
5492.13,2755.91 to 4724.41,1377.95 on Drill Drawing